# EAGLE board bitsyled-v1 (EAGLE 8.3.2)
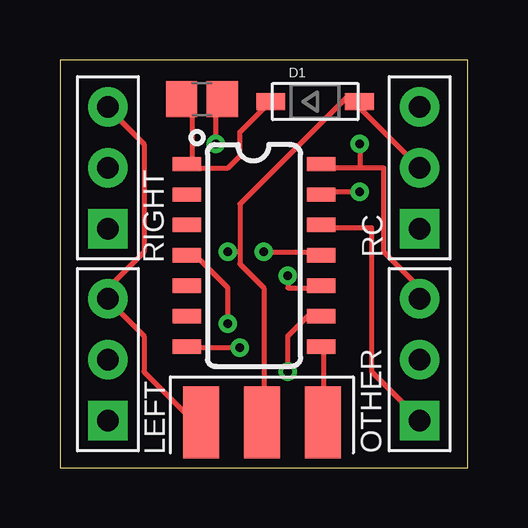
[diagram p0: board, top side]
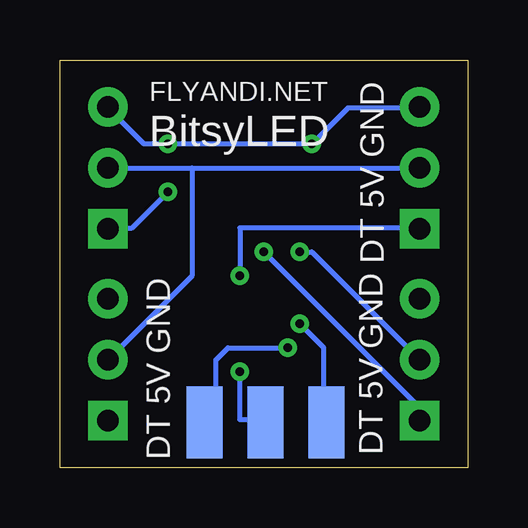
[diagram p1: board, bottom side, seen from below]

Size 17 x 17 mm. Coordinates in mm from the lower left corner, seen from the top.
Outline: 0,0 17,0 17,17 0,17 0,0
Copper layers (1*16): Top 0.035mm / dielectric 1.5mm / Bottom 0.035mm
Design rules "default": minimum track width 6mil, minimum drill 0.35mm, track to track 6mil, track to pad 6mil, pad to pad 6mil, via to via 6mil, smd to smd 6mil, copper to edge 40mil, drill to drill 6mil, minimum pad ring 10mil, minimum via ring 8mil, stop-mask expansion 4mil, vias tented up to drill 0mil, thermal gap 10mil
Net classes: 0 default: width 0.203 mm, drill 0.203 mm, clearance 0.254 mm

## Footprints (pad centres in the part's own frame; a part is rotated, then mirrored left to right if it is on the bottom)
C0805 = smd 1.3 x 1.5: 1 -0.85,0; 2 0.85,0
SOD-123 = smd 1.2 x 0.7: A 1.85,0; C -1.85,0
H3-2.54 = drill 0.889 pad 1.651 square: 1 0,2.54 | drill 0.889 pad 1.651: 2 0,0; 3 0,-2.54
SMDPAD_TB_3X3 = smd 3 x 1.5: 1 -7.62,7.62; 2 -7.62,5.08; 3 -7.62,2.54 | smd 3 x 1.5 bottom: 4 -7.62,2.54; 5 -7.62,5.08; 6 -7.62,7.62
SO14 = smd 0.6 x 1.2: 1 -3.175,-2.8; 2 -1.905,-2.8; 3 -0.635,-2.8; 4 0.635,-2.8; 5 1.905,-2.8; 6 3.175,-2.8; 7 4.445,-2.8; 8 4.445,2.8; 9 3.175,2.8; 10 1.905,2.8; 11 0.635,2.8; 12 -0.635,2.8; 13 -1.905,2.8; 14 -3.175,2.8

## Placement (x,y rotation side)
C1  [C0805]  5.92,15.37 0 top
D1  [SOD-123]  10.64,15.27 0 top
LEFT  3p-2.54  [H3-2.54]  2,4.5 180 top
OTHER  3p-2.54  [H3-2.54]  15,4.5 180 top
PRG  SMDPAD_TB_3X3  [SMDPAD_TB_3X3]  13.5,9.5 90 top
RC  3p-2.54  [H3-2.54]  15,12.5 180 top
RIGHT  3p-2.54  [H3-2.54]  2,12.5 180 top
SLAVECTRL  ATTINY84  [SO14]  8.09,9.48 270 top

## Library data of the parts
C1 D1 = adafruit
LEFT OTHER RC RIGHT = Seeed-Connector
PRG = FPVTools
SLAVECTRL = SparkFun-IC-Microcontroller; PROD_ID: IC-11285

## Nets
5V: D1.A LEFT.2 OTHER.2 PRG.2 RC.2 RIGHT.2
GND: C1.2 LEFT.3 OTHER.3 PRG.1 RC.3 RIGHT.3 SLAVECTRL.14
LD0: OTHER.1 SLAVECTRL.12
LD1: LEFT.1 SLAVECTRL.11
LD2: RIGHT.1 SLAVECTRL.10
MISO: PRG.3 SLAVECTRL.8
RC: RC.1 SLAVECTRL.13
RESET: PRG.6 SLAVECTRL.4
SCL: PRG.5 SLAVECTRL.9
SDA: PRG.4 SLAVECTRL.7
VR: C1.1 D1.C SLAVECTRL.1

## Tracks (layer width: path | path; a pad name or v marks a point on that pad's centre or on a via)
5V  (via drill 0.35)
  Top 0.203: RC.2 12.5,15 D1.A 12,15.5 7.5,11 7.5,9 | 7.5,9 7.5,8.5 8.5,7.5 8.5,2 PRG.2 | 7.5,9 v7,9
  Bottom 0.203: LEFT.2 6.5,9 v7,9 | RC.2 11.5,12.5 | 11.5,12.5 RIGHT.2 | OTHER.2 11.5,8 11.5,12.5
GND  (via drill 0.35)
  Top 0.203: PRG.1 5.5,2 3.5,4 3.5,5.5 2,7 LEFT.3 2,7.5 3.5,9 3.5,13.5 2,15 RIGHT.3 | 12.5,12.5 13.5,12.5 13.5,9 15,7.5 OTHER.3 | 12.5,12.5 11,12.5 SLAVECTRL.14 | v6.5,13.5 6.5,15 C1.2 | v12.5,13.5 12.5,12.5
  Bottom 0.203: RIGHT.3 2,15 5,15 v6.5,13.5 v12.5,13.5 13.5,13.5 15,15 RC.3
LD0
  Top 0.203: SLAVECTRL.12 11,10 13,10 13,4 15,2 OTHER.1
LD1  (via drill 0.35)
  Top 0.203: v8.5,9 10.5,9 SLAVECTRL.11
  Bottom 0.203: v8.5,9 2,2.5 LEFT.1
LD2  (via drill 0.35)
  Top 0.203: v9.5,8 9.5,7.5 10.5,7.5 SLAVECTRL.10
  Bottom 0.203: v9.5,8 9.5,10 2,10 RIGHT.1
MISO
  Top 0.203: SLAVECTRL.8 11,5 11,2 PRG.3
RC  (via drill 0.35)
  Top 0.203: v12.5,11.5 11,11.5 SLAVECTRL.13
  Bottom 0.203: v12.5,11.5 14,10 15,10 RC.1
RESET  (via drill 0.35)
  Top 0.203: v7,6 7,7.5 5.5,9 SLAVECTRL.4
  Bottom 0.203: v7,6 6,5 6,2 PRG.6
SCL  (via drill 0.35)
  Top 0.203: v9.5,4 9.5,5.5 10.5,6.5 SLAVECTRL.9
  Bottom 0.203: v9.5,4 9.5,2 8.5,2 PRG.5
SDA  (via drill 0.35)
  Top 0.203: v7.5,5 5.5,5 SLAVECTRL.7
  Bottom 0.203: v7.5,5 10,5 10.5,4.5 10.5,2 PRG.4
VR
  Top 0.203: 5.5,12.5 5.5,15 C1.1 | 5.5,12.5 7,12.5 7.5,13 7.5,14 8.5,15 D1.C | 5.5,12.5 SLAVECTRL.1

## Text on the board
bPlace: DT 5V GND | FLYANDI.NET | BitsyLED | DT 5V GND | DT 5V GND